# Altium PCB SPT3G_LCBoardRev0.PcbDoc (part 2 of 3)
Units mil, origin at the board's own origin, x right, y up, seen from the top; angles counter-clockwise.
Board outline 7438.98 x 1969 mil, 6 copper layers (Top Layer, Signal Layer 1, Internal Plane 1, Internal Plane 2, Signal Layer 2, Bottom Layer), stack 61.6 mil thick; 29 components, 149 nets, 701 pads, 136 vias.
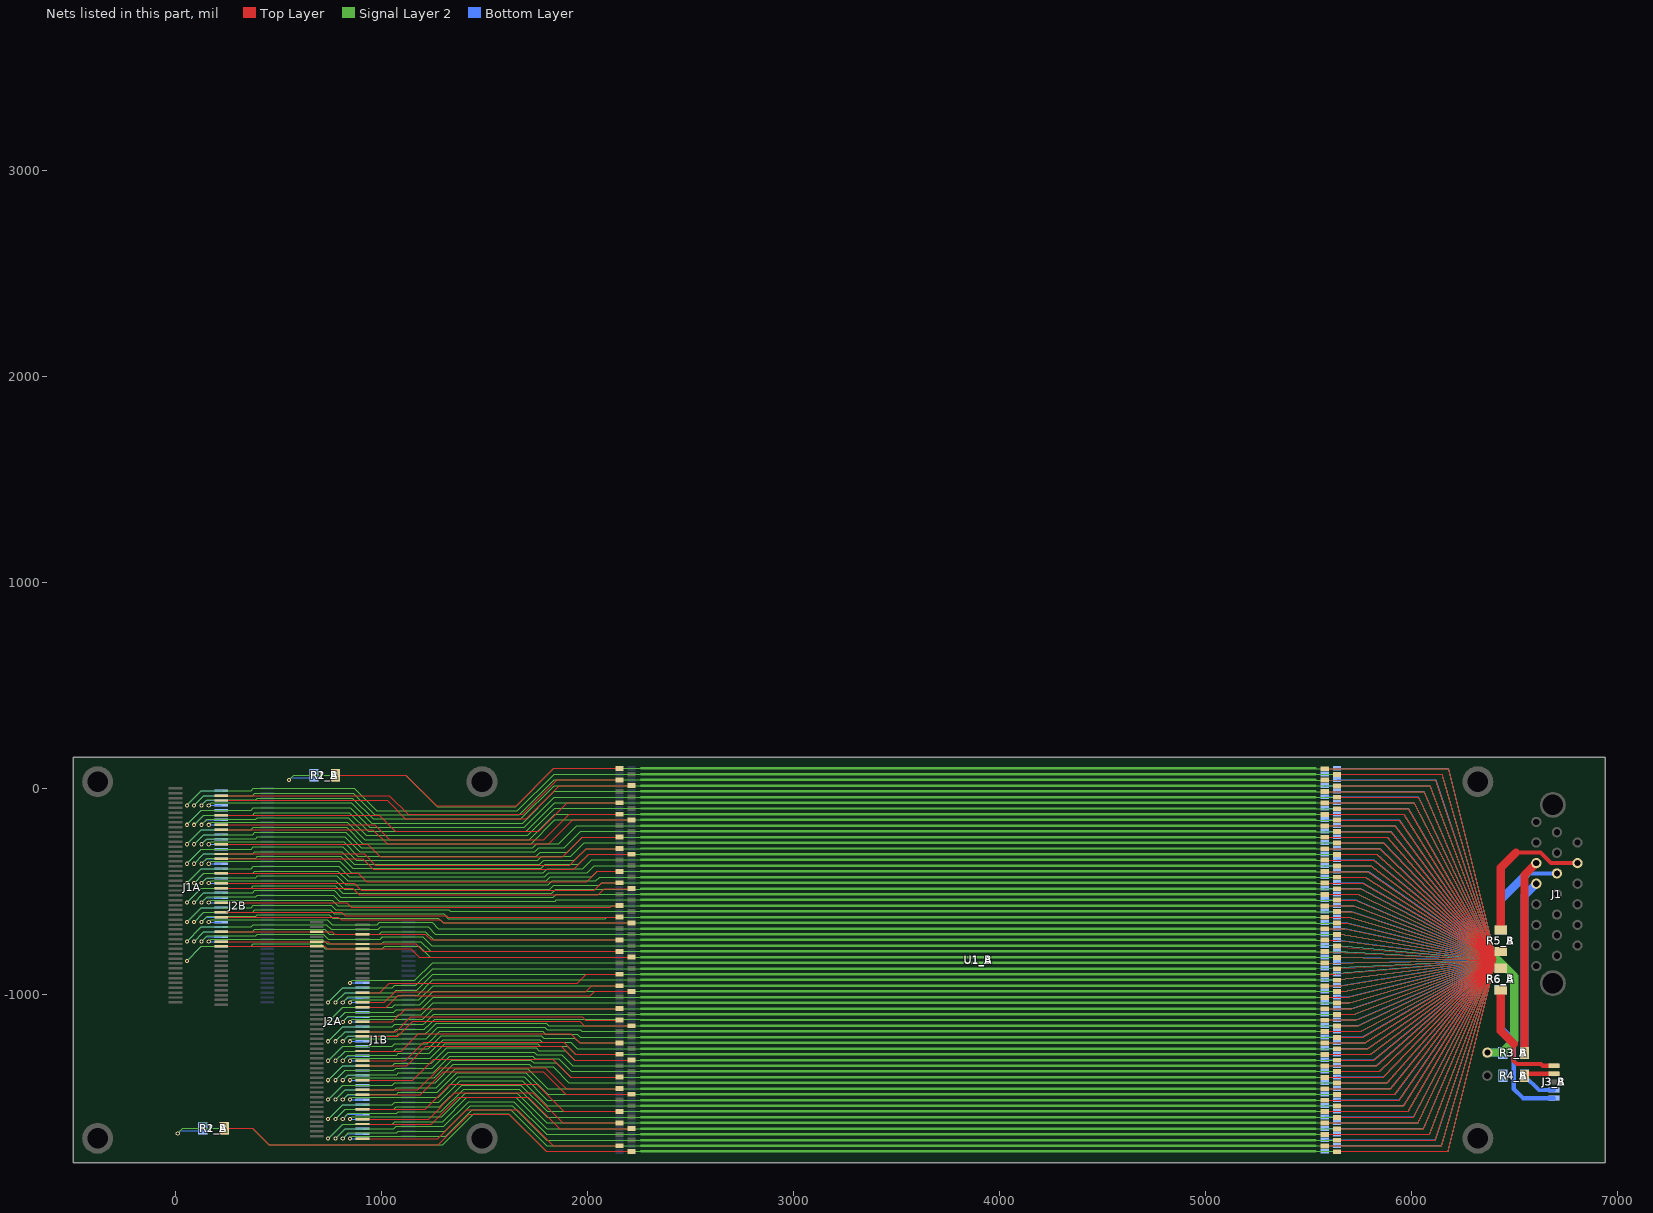
[diagram p6: the nets of this part, all layers, seen from the top]

## Via types
v1: diameter 20, hole 10, Top Layer to Bottom Layer, 136 vias

## Nets (pads, with @x,y where several pads share a name; then routed paths per layer and width w, separated by ;. In a path a pad name is that pad's centre, name@x,y a point inside that pad or via, vN(x,y) a via of type N, cw(c..) or ccw(c..) an arc to the next point about the centre after c; other vN are vias at no path point) (continued)
BOLORETURN_B: J1B.1 J1B.3 J1B.5 J1B.7 J1B.9 J1B.11 J1B.13 J1B.15 J1B.17 J1B.19 J1B.21 J1B.23 J1B.25 J1B.27 J1B.29 J1B.31 J1B.33 J1B.35 J1B.37 J1B.39 J1B.41 J1B.43 J1B.45 J1B.47 J1B.49 J1B.51 J1B.53 J1B.55 J1B.57 J1B.59 J1B.61 J1B.63 J1B.65 J2B.25 J2B.27 J2B.29 J2B.31 J2B.33 J2B.35 J2B.37 J2B.39 J2B.41 J2B.43 J2B.45 J2B.47 J2B.49 J2B.51 J2B.53 J2B.55 J2B.57 J2B.59 J2B.61 J2B.63 J2B.65 J2B.67 J2B.69 J2B.71 J2B.73 J2B.75 J2B.77 J2B.79 J2B.81 J2B.83 J2B.85 J2B.87 J2B.89 pad.0@6369.59,-1283.27 R1_B.1 R2_B.1 R3_B.1 R4_B.1 | length 436211.5
  Signal Layer 2 w6: v1(10.74,-1675.14) 34.64,-1651.23 34.74,-1651.33 373.22,-1651.33 453.76,-1731.87 1297.1,-1731.87 1448.27,-1580.7 1618.25,-1580.7 1800.88,-1763.33 2260,-1763.33 ; v1(55.12,-838.58) 125.98,-767.72 366.67,-767.72 378.48,-755.91 704.48,-755.91 727.52,-778.94 1004.78,-778.94 1016,-767.72 1184.37,-767.72 1236.29,-819.63 2260,-819.63 ; v1(55.12,-744.09) 125.98,-673.23 366.67,-673.23 378.48,-661.42 731.57,-661.42 755.19,-685.04 983.62,-685.04 995.43,-673.23 1226.41,-673.23 1261.79,-708.61 2260,-708.61 ; v1(55.12,-649.61) 125.98,-578.74 366.67,-578.74 378.48,-566.93 755.66,-566.93 778.56,-589.83 1326.98,-589.83 1334.73,-597.58 2260,-597.58 ; v1(55.12,-555.12) 125.98,-484.25 366.67,-484.25 378.48,-472.44 774.31,-472.44 810.77,-508.9 1826.06,-508.9 1845.25,-489.72 2260,-489.72 ; v1(55.12,-460.63) 125.98,-389.76 366.67,-389.76 378.48,-377.95 792.96,-377.95 843.91,-428.9 1792.93,-428.9 1812.11,-409.72 1999.95,-409.72 2034.13,-375.54 2260,-375.54 ; v1(55.12,-366.14) 125.98,-295.28 366.67,-295.28 378.48,-283.46 811.61,-283.46 877.05,-348.9 1759.79,-348.9 1778.98,-329.72 1919.07,-329.72 1984.28,-264.51 2260,-264.51 ; v1(55.12,-271.65) 125.98,-200.79 366.67,-200.79 378.48,-188.98 830.26,-188.98 910.18,-268.9 1726.65,-268.9 1842.07,-153.49 2260,-153.49 ; v1(55.12,-177.17) 125.98,-106.3 366.67,-106.3 378.48,-94.49 848.91,-94.49 943.32,-188.9 1693.52,-188.9 1839.96,-42.46 2260,-42.46 ; v1(55.12,-82.68) 125.98,-11.81 366.67,-11.81 378.48,0 867.55,0 976.46,-108.9 1660.38,-108.9 1837.84,68.56 2260,68.56 ; v1(90.55,-744.09) 137.8,-696.85 373.9,-696.85 385.71,-685.04 723.37,-685.04 746.99,-708.66 988.89,-708.66 1000.7,-696.85 1213.1,-696.85 1252.61,-736.36 2260,-736.36 ; v1(90.55,-649.61) 137.8,-602.36 373.9,-602.36 385.71,-590.55 750.69,-590.55 769.74,-609.61 ; v1(90.55,-555.12) 137.8,-507.87 373.9,-507.87 385.71,-496.06 769.65,-496.06 802.49,-528.9 1834.35,-528.9 1848.86,-514.39 2258.77,-514.39 2260,-513.17 ; v1(90.55,-460.63) 137.8,-413.39 373.9,-413.39 385.71,-401.57 788.3,-401.57 835.63,-448.9 1801.21,-448.9 1820.4,-429.72 2021.97,-429.72 2048.4,-403.29 2260,-403.29 ; v1(90.55,-366.14) 137.8,-318.9 373.9,-318.9 385.71,-307.09 806.95,-307.09 868.76,-368.9 1768.08,-368.9 1787.26,-349.72 1936.53,-349.72 1993.98,-292.27 2260,-292.27 ; v1(90.55,-271.65) 137.8,-224.41 373.9,-224.41 385.71,-212.6 825.59,-212.6 901.9,-288.9 1734.94,-288.9 1754.6,-269.24 1860.91,-269.24 1948.91,-181.24 2260,-181.24 ; v1(90.55,-177.17) 137.8,-129.92 373.9,-129.92 385.71,-118.11 844.24,-118.11 935.04,-208.9 1701.8,-208.9 1840.48,-70.22 2260,-70.22 ; v1(90.55,-82.68) 137.8,-35.43 373.9,-35.43 385.71,-23.62 862.89,-23.62 968.17,-128.9 1668.67,-128.9 1838.37,40.8 2260,40.8 ; v1(125.98,-744.09) 153.54,-716.54 388.33,-716.54 396.2,-708.66 717.57,-708.66 741.28,-732.36 993.27,-732.36 ; v1(125.98,-649.61) 153.54,-622.05 388.33,-622.05 396.2,-614.17 746.66,-614.17 762.09,-629.61 ; v1(125.98,-555.12) 153.54,-527.56 388.33,-527.56 396.2,-519.68 764.99,-519.68 794.2,-548.9 1842.63,-548.9 1849.47,-542.07 2260,-542.07 ; v1(125.98,-460.63) 153.54,-433.07 388.33,-433.07 396.2,-425.2 783.63,-425.2 827.34,-468.9 1809.5,-468.9 1828.68,-449.72 2040.22,-449.72 2058.89,-431.05 2260,-431.05 ; v1(125.98,-366.14) 153.54,-338.58 388.33,-338.58 396.2,-330.71 802.28,-330.71 860.48,-388.9 1776.36,-388.9 1795.55,-369.72 1956.27,-369.72 2005.97,-320.02 2260,-320.02 ; v1(125.98,-271.65) 153.54,-244.09 388.33,-244.09 396.2,-236.22 820.93,-236.22 893.61,-308.9 1743.22,-308.9 1762.88,-289.24 1886.65,-289.24 1966.89,-209 2260,-209 ; v1(125.98,-177.17) 153.54,-149.61 388.33,-149.61 396.2,-141.73 839.58,-141.73 926.75,-228.9 1710.09,-228.9 1841.01,-97.98 2260,-97.98 ; v1(125.98,-82.68) 153.54,-55.12 388.33,-55.12 396.2,-47.24 858.23,-47.24 959.89,-148.9 1676.95,-148.9 1838.9,13.05 2260,13.05 ; v1(161.42,-744.09) 173.23,-732.28 712.68,-732.28 736.3,-755.91 998.32,-755.91 1010.13,-744.09 1190.45,-744.09 1238.23,-791.87 2260,-791.87 ; v1(161.42,-649.61) 173.23,-637.8 736.17,-637.8 759.79,-661.42 979.46,-661.42 990.04,-650.84 1245.56,-650.84 1275.57,-680.85 2260,-680.85 ; v1(161.42,-555.12) 173.23,-543.31 760.32,-543.31 786.84,-569.83 957.11,-569.83 957.33,-569.61 1164,-569.61 1164.22,-569.83 2260,-569.83 ; v1(161.42,-460.63) 173.23,-448.82 778.97,-448.82 819.06,-488.9 1817.78,-488.9 1836.97,-469.72 2058.2,-469.72 2069.11,-458.8 2260,-458.8 ; v1(161.42,-366.14) 173.23,-354.33 797.62,-354.33 852.19,-408.9 1784.64,-408.9 1803.83,-389.72 1978.24,-389.72 2020.17,-347.78 2260,-347.78 ; v1(161.42,-271.65) 173.23,-259.84 816.27,-259.84 885.33,-328.9 1751.51,-328.9 1770.69,-309.72 1903.06,-309.72 1976.02,-236.76 2260,-236.76 ; v1(161.42,-177.17) 173.23,-165.35 834.92,-165.35 918.47,-248.9 1718.37,-248.9 1841.54,-125.73 2260,-125.73 ; v1(161.42,-82.68) 173.23,-70.87 853.57,-70.87 951.6,-168.9 1685.23,-168.9 1839.43,-14.71 2260,-14.71 ; v1(550.8,40.1) 574.7,64 1118.5,64 1271.4,-88.9 1652.1,-88.9 1837.31,96.32 2260,96.32 ; v1(741.1,-1700.79) 811.97,-1629.92 1052.66,-1629.92 1064.47,-1618.11 1297.72,-1618.11 1415.13,-1500.7 1651.39,-1500.7 1803,-1652.31 2260,-1652.31 ; v1(741.1,-1606.3) 811.97,-1535.43 1052.66,-1535.43 1064.47,-1523.62 1130.87,-1523.62 1279.07,-1523.62 1381.99,-1420.7 1684.52,-1420.7 1805.11,-1541.28 2260,-1541.28 ; v1(741.1,-1511.81) 811.97,-1440.94 1052.66,-1440.94 1064.47,-1429.13 1130.87,-1429.13 1260.42,-1429.13 1348.86,-1340.7 1717.66,-1340.7 1730.03,-1353.07 1833.26,-1353.07 1910.45,-1430.26 2260,-1430.26 ; v1(741.1,-1417.32) 811.97,-1346.46 1052.66,-1346.46 1064.47,-1334.65 1130.87,-1334.65 1241.77,-1334.65 1315.72,-1260.7 1750.8,-1260.7 1763.17,-1273.07 1893.32,-1273.07 1939.49,-1319.24 2260,-1319.24 ; v1(741.1,-1322.83) 811.97,-1251.97 1052.66,-1251.97 1064.47,-1240.16 1130.87,-1240.16 1222.52,-1240.16 1247.87,-1214.8 1248.48,-1214.8 1282.58,-1180.7 1783.94,-1180.7 1796.31,-1193.07 1950.7,-1193.07 1965.85,-1208.21 2260,-1208.21 ; v1(741.1,-1228.35) 811.97,-1157.48 1052.65,-1157.48 1064.47,-1145.67 1130.87,-1145.67 1203.87,-1145.67 1214.73,-1134.8 1215.34,-1134.8 1252.96,-1097.19 2260,-1097.19 ; v1(741.1,-1133.86) 811.97,-1062.99 1052.65,-1062.99 1064.47,-1051.18 1130.87,-1051.18 1185.83,-1051.18 1250.84,-986.17 2260,-986.17 ; v1(741.1,-1039.37) 811.97,-968.5 1052.66,-968.5 1064.47,-956.69 1130.87,-956.69 1167.18,-956.69 1248.73,-875.14 2260,-875.14 ; 762.31,-629.83 1276.09,-629.83 1299.36,-653.09 2260,-653.09 ; 769.96,-609.83 1301.54,-609.83 1324.21,-632.5 2087.22,-632.5 2094.71,-625.01 2260,-625.01 ; v1(776.54,-1700.79) 823.78,-1653.54 1059.88,-1653.54 1071.69,-1641.73 1302.38,-1641.73 1423.42,-1520.7 1643.1,-1520.7 1802.47,-1680.06 2260,-1680.06 ; v1(776.54,-1606.3) 823.78,-1559.06 1059.88,-1559.06 1071.69,-1547.24 1130.87,-1547.24 1283.73,-1547.24 1390.28,-1440.7 1676.24,-1440.7 1804.58,-1569.04 2260,-1569.04 ; v1(776.54,-1511.81) 823.78,-1464.57 1059.88,-1464.57 1071.69,-1452.76 1130.87,-1452.76 1265.08,-1452.76 1357.14,-1360.7 1709.38,-1360.7 1806.7,-1458.02 2260,-1458.02 ; v1(776.54,-1417.32) 823.78,-1370.08 1059.88,-1370.08 1071.69,-1358.27 1130.87,-1358.27 1246.43,-1358.27 1324,-1280.7 1742.51,-1280.7 1754.89,-1293.07 1875.02,-1293.07 1928.95,-1346.99 2260,-1346.99 ; v1(776.54,-1322.83) 823.78,-1275.59 1059.88,-1275.59 1071.69,-1263.78 1130.87,-1263.78 1227.18,-1263.78 1256.16,-1234.8 1256.76,-1234.8 1290.87,-1200.7 1775.65,-1200.7 1788.02,-1213.07 1939.46,-1213.07 1962.36,-1235.97 2260,-1235.97 ; v1(776.54,-1228.35) 823.78,-1181.1 1059.88,-1181.1 1071.69,-1169.29 1130.87,-1169.29 1208.53,-1169.29 1223.02,-1154.8 1223.63,-1154.8 1257.73,-1120.7 2260,-1120.7 ; v1(776.54,-1133.86) 823.78,-1086.61 1059.88,-1086.61 1071.69,-1074.8 1130.87,-1074.8 1190.49,-1074.8 1251.37,-1013.92 2260,-1013.92 ; v1(776.54,-1039.37) 823.78,-992.13 1059.88,-992.13 1071.69,-980.31 1171.84,-980.31 1249.26,-902.9 2260,-902.9 ; v1(811.97,-1700.79) 839.53,-1673.23 1074.31,-1673.23 1082.19,-1665.35 1307.04,-1665.35 1431.7,-1540.7 1634.82,-1540.7 1801.94,-1707.82 2260,-1707.82 ; v1(811.97,-1606.3) 839.53,-1578.74 1074.31,-1578.74 1082.19,-1570.87 1130.87,-1570.87 1288.39,-1570.87 1398.56,-1460.7 1667.96,-1460.7 1804.05,-1596.8 2260,-1596.8 ; v1(811.97,-1511.81) 839.53,-1484.25 1074.31,-1484.25 1082.19,-1476.38 1130.87,-1476.38 1269.75,-1476.38 1365.43,-1380.7 1701.09,-1380.7 1806.17,-1485.77 2260,-1485.77 ; v1(811.97,-1417.32) 839.53,-1389.76 1074.31,-1389.76 1082.19,-1381.89 1130.87,-1381.89 1251.1,-1381.89 1332.29,-1300.7 1734.23,-1300.7 1746.6,-1313.07 1860.01,-1313.07 1921.69,-1374.75 2260,-1374.75 ; v1(811.97,-1322.83) 839.53,-1295.28 1074.31,-1295.28 1082.19,-1287.4 1130.87,-1287.4 1232.45,-1287.4 1299.15,-1220.7 1767.37,-1220.7 1779.74,-1233.07 1920.07,-1233.07 1950.72,-1263.72 2260,-1263.72 ; v1(811.97,-1228.35) 839.53,-1200.79 1074.31,-1200.79 1082.19,-1192.91 1130.87,-1192.91 1213.19,-1192.91 1231.3,-1174.8 1231.91,-1174.8 1266.02,-1140.7 1800.5,-1140.7 1812.88,-1153.07 2260,-1153.07 ; v1(811.97,-1133.86) 839.53,-1106.3 1074.31,-1106.3 1082.19,-1098.43 1130.87,-1098.43 1194.54,-1098.43 1198.17,-1094.8 1198.77,-1094.8 1251.9,-1041.68 2260,-1041.68 ; v1(811.97,-1039.37) 839.53,-1011.81 1074.31,-1011.81 1082.19,-1003.94 1130.87,-1003.94 1176.5,-1003.94 1249.79,-930.65 2260,-930.65 ; v1(847.4,-1700.79) 859.21,-1688.98 1311.71,-1688.98 1439.98,-1560.7 1626.54,-1560.7 1801.41,-1735.57 2260,-1735.57 ; v1(847.4,-1606.3) 859.21,-1594.49 1130.87,-1594.49 1293.06,-1594.49 1406.85,-1480.7 1659.67,-1480.7 1803.53,-1624.55 2260,-1624.55 ; v1(847.4,-1511.81) 859.21,-1500 1130.87,-1500 1274.41,-1500 1373.71,-1400.7 1692.81,-1400.7 1805.64,-1513.53 2260,-1513.53 ; v1(847.4,-1417.32) 859.21,-1405.51 1130.87,-1405.51 1255.76,-1405.51 1340.57,-1320.7 1725.95,-1320.7 1738.32,-1333.07 1849.37,-1333.07 1918.8,-1402.5 2260,-1402.5 ; v1(847.4,-1322.83) 859.21,-1311.02 1130.87,-1311.02 1237.11,-1311.02 1307.44,-1240.7 1759.08,-1240.7 1771.46,-1253.07 1901.61,-1253.07 1940.02,-1291.48 2260,-1291.48 ; v1(847.4,-1228.35) 859.21,-1216.54 1130.87,-1216.54 1217.85,-1216.54 1239.59,-1194.8 1240.19,-1194.8 1274.3,-1160.7 1792.22,-1160.7 1804.59,-1173.07 1965.53,-1173.07 1972.92,-1180.46 2260,-1180.46 ; v1(847.4,-1133.86) 859.21,-1122.05 1130.87,-1122.05 1199.21,-1122.05 1206.45,-1114.8 1207.06,-1114.8 1252.43,-1069.43 2260,-1069.43 ; v1(847.4,-1039.37) 859.21,-1027.56 1181.16,-1027.56 1250.31,-958.41 2260,-958.41 ; v1(847.4,-944.88) 859.21,-933.07 1162.52,-933.07 1248.2,-847.39 2260,-847.39 ; 1004.14,-721.5 993.27,-732.36 ; 2260,-764.12 1243.06,-764.12 1199.42,-720.47 1005.16,-720.47 993.27,-732.36 ; 5532.88,-1680.06 6088.99,-1680.06 6399.51,-861.65 6399.88,-860.67 6410,-834 ; 5532.88,-1652.3 6061.32,-1652.3 6399.02,-859.78 6399.42,-858.83 6410,-834 ; 5532.88,-1624.54 6034.95,-1624.54 6410,-834 ; 5532.88,-1596.79 6012.68,-1596.79 6410,-834 ; 5532.88,-1569.03 5985.93,-1569.03 6410,-834 ; 5532.88,-1541.28 5963.16,-1541.28 6410,-834 ; 5532.88,-1513.52 5941.51,-1513.52 6410,-834 ; 5532.88,-1346.98 5832.55,-1346.98 6410,-834 ; 5532.88,-1291.47 5802.37,-1291.47 6410,-834 ; 5532.88,-1263.72 5789.87,-1263.72 6410,-834 ; 5532.88,-1208.2 5765.06,-1208.2 6410,-834 ; 5532.88,-1152.69 5742.65,-1152.69 6410,-834 ; 5532.88,-1124.94 5732.15,-1124.94 5742.65,-1120.41 6410,-834 ; 5532.88,-1097.18 5721.94,-1097.18 6410,-834 ; 5532.88,-1069.43 5711.84,-1069.43 6410,-834 ; 5532.88,-1041.67 5701.55,-1041.67 6410,-834 ; 5532.88,-1013.91 5690.58,-1013.91 6410,-834 ; 5532.88,-986.16 5678.1,-986.16 6410,-834 ; 5532.88,-958.4 5662.44,-958.4 6410,-834 ; 5532.89,-930.65 5639.81,-930.65 6410,-834 ; 5532.88,-764.12 5639.06,-763.17 6410,-834 ; 5532.88,-737.36 5639.81,-737.36 6410,-834 ; 5532.88,-709.61 5662.44,-709.61 6410,-834 ; 5532.88,-681.85 5678.1,-681.85 6410,-834 ; 5532.88,-654.09 5690.58,-654.09 6410,-834 ; 5532.88,-626.34 5701.55,-626.34 6410,-834 ; 5532.88,-570.83 5721.94,-570.83 6410,-834 ; 5532.88,-515.31 5742.65,-515.31 6410,-834 ; 5532.88,-459.8 5765.06,-459.8 6410,-834 ; 5532.88,-404.29 5789.87,-404.29 6410,-834 ; 5532.88,-376.54 5802.37,-376.54 6410,-834 ; 5532.88,-348.78 5817.53,-348.78 6410,-834 ; 5532.88,-321.02 5832.55,-321.02 6410,-834 ; 5532.88,-293.27 5847.23,-293.27 6410,-834 ; 5532.88,-265.51 5865.13,-265.51 6410,-834 ; 5532.88,-237.76 5882.76,-237.76 6410,-834 ; 5532.88,-210 5901.35,-210 6410,-834 ; 5532.88,95.32 6180.49,95.32 6401.87,-801.07 ; 5533.88,-1763.32 6180.49,-1763.32 6401.87,-866.94 ; 5533.88,-1735.57 6148.51,-1735.57 6400.94,-865.24 6401.24,-864.21 6410,-834 ; 5533.88,-1707.73 6117.7,-1708.81 6400.15,-863.47 6400.49,-862.47 6410,-834 ; 5533.88,-1485.76 5920.92,-1485.76 6410,-834 ; 5533.88,-1458.01 5901.35,-1458.01 6410,-834 ; 5533.88,-1430.25 5882.76,-1430.25 6410,-834 ; 5533.88,-1402.5 5865.13,-1402.5 6410,-834 ; 5533.88,-1374.74 5847.23,-1374.74 6410,-834 ; 5533.88,-1319.23 5817.53,-1319.23 6410,-834 ; 5533.88,-1235.96 5777.13,-1235.96 6410,-834 ; 5533.88,-1180.45 5753.59,-1180.45 6410,-834 ; 5533.88,-903.9 5580,-902.9 6410,-834 ; 5533.88,-876.14 5701.55,-866.94 6410,-834 ; 5533.88,-848.39 5580,-848.39 6410,-834 ; 5533.88,-820.63 5639.06,-820.63 6410,-834 ; 5533.88,-792.87 5690.58,-792.87 6410,-834 ; 5533.88,-598.58 5711.84,-598.58 6410,-834 ; 5533.88,-543.07 5732.15,-543.07 5742.65,-547.59 6410,-834 ; 5533.88,-487.56 5753.59,-487.56 6410,-834 ; 5533.88,-432.05 5777.13,-432.05 6410,-834 ; 5533.88,-182.24 5920.92,-182.24 6410,-834 ; 5533.88,-154.49 5941.51,-154.49 6410,-834 ; 5533.88,-126.73 5963.16,-126.73 6410,-834 ; 5533.88,-98.98 5985.93,-98.98 6410,-834 ; 5533.88,-71.22 6012.68,-71.22 6410,-834 ; 5533.88,-43.46 6034.95,-43.46 6410,-834 ; 5533.88,-15.71 6061.32,-15.71 6399.02,-808.23 6410,-834 ; 5533.88,12.05 6088.99,12.05 6399.51,-806.36 6410,-834 ; 5533.88,39.8 5580,39.8 6117.7,40.8 6400.15,-804.53 6410,-834 ; 5533.88,67.56 6148.51,67.56 6400.94,-802.77 6410,-834 ; 6401.87,-866.94 6402.13,-865.88 ; 6401.87,-866.94 6402.13,-865.89 ; 6401.87,-801.07 6410,-834 ; 6401.87,-801.07 6410,-834 ; 6402.13,-865.89 6410,-834 ; 6402.13,-865.88 6410,-834
  Signal Layer 2 w12: 2260,-1763.33 5532.88,-1763.33 ; 2260,-1735.57 5532.88,-1735.57 ; 2260,-1707.82 5532.88,-1707.82 ; 2260,-1680.06 5532.88,-1680.06 ; 2260,-1652.31 5532.88,-1652.31 ; 2260,-1624.55 5532.88,-1624.55 ; 2260,-1596.8 5532.88,-1596.8 ; 2260,-1569.04 5532.88,-1569.04 ; 2260,-1541.28 5532.88,-1541.28 ; 2260,-1513.53 5532.88,-1513.53 ; 2260,-1485.77 5532.88,-1485.77 ; 2260,-1458.02 5532.88,-1458.02 ; 2260,-1430.26 5532.88,-1430.26 ; 2260,-1402.5 5532.88,-1402.5 ; 2260,-1374.75 5532.88,-1374.75 ; 2260,-1346.99 5532.88,-1346.99 ; 2260,-1319.24 5532.88,-1319.24 ; 2260,-1291.48 5532.88,-1291.48 ; 2260,-1263.72 5532.88,-1263.72 ; 2260,-1235.97 5532.88,-1235.97 ; 2260,-1208.21 5532.88,-1208.21 ; 2260,-1180.46 5532.88,-1180.46 ; 2260,-1152.7 5532.88,-1152.7 ; 2260,-1124.94 5532.88,-1124.94 ; 2260,-1097.19 5532.88,-1097.19 ; 2260,-1069.43 5532.88,-1069.43 ; 2260,-1041.68 5532.88,-1041.68 ; 2260,-1013.92 5532.88,-1013.92 ; 2260,-986.17 5532.88,-986.17 ; 2260,-958.41 5532.88,-958.41 ; 2260,-930.65 5532.88,-930.65 ; 2260,-902.9 5532.88,-902.9 ; 2260,-875.14 5532.88,-875.14 ; 2260,-847.39 5532.88,-847.39 ; 2260,-819.63 5532.88,-819.63 ; 2260,-791.87 5532.88,-791.87 ; 2260,-764.12 5532.88,-764.12 ; 2260,-736.36 5532.88,-736.36 ; 2260,-708.61 5532.88,-708.61 ; 2260,-680.85 5532.88,-680.85 ; 2260,-653.09 5532.88,-653.09 ; 2260,-625.34 5532.88,-625.34 ; 2260,-597.58 5532.88,-597.58 ; 2260,-569.83 5532.88,-569.83 ; 2260,-542.07 5532.88,-542.07 ; 2260,-514.31 5532.88,-514.31 ; 2260,-486.56 5532.88,-486.56 ; 2260,-458.8 5532.88,-458.8 ; 2260,-431.05 5532.88,-431.05 ; 2260,-403.29 5532.88,-403.29 ; 2260,-375.54 5532.88,-375.54 ; 2260,-347.78 5532.88,-347.78 ; 2260,-320.02 5532.88,-320.02 ; 2260,-292.27 5532.88,-292.27 ; 2260,-264.51 5532.88,-264.51 ; 2260,-236.76 5532.88,-236.76 ; 2260,-209 5532.88,-209 ; 2260,-181.24 5532.88,-181.24 ; 2260,-153.49 5532.88,-153.49 ; 2260,-125.73 5532.88,-125.73 ; 2260,-97.98 5532.88,-97.98 ; 2260,-70.22 5532.88,-70.22 ; 2260,-42.46 5532.88,-42.46 ; 2260,-14.71 5532.88,-14.71 ; 2260,13.05 5532.88,13.05 ; 2260,40.8 5532.88,40.8 ; 2260,68.56 5532.88,68.56 ; 2260,96.32 5532.88,96.32
  Signal Layer 2 w40: pad.0@6369.59,-1283.27 6440.09,-1283.27 6500.5,-1222.86 6500.5,-913.15 6421.35,-834 6410,-834
  Bottom Layer w6: v1(10.74,-1675.14) 22.95,-1662.93 R1_B.1@131.91,-1662.93 ; v1(55.12,-838.58) 125.98,-767.72 J2B.25@222.44,-767.72 ; v1(55.12,-744.09) 125.98,-673.23 J2B.33@222.44,-673.23 ; v1(55.12,-649.61) 125.98,-578.74 J2B.41@222.44,-578.74 ; v1(55.12,-555.12) 125.98,-484.25 J2B.49@222.44,-484.25 ; v1(55.12,-460.63) 125.98,-389.76 J2B.57@222.44,-389.76 ; v1(55.12,-366.14) 125.98,-295.28 J2B.65@222.44,-295.28 ; v1(55.12,-271.65) 125.98,-200.79 J2B.73@222.44,-200.79 ; v1(55.12,-177.17) 125.98,-106.3 J2B.81@222.44,-106.3 ; v1(55.12,-82.68) 125.98,-11.81 J2B.89@222.44,-11.81 ; v1(90.55,-744.09) 137.8,-696.85 J2B.31@222.44,-696.85 ; v1(90.55,-649.61) 137.8,-602.36 J2B.39@222.44,-602.36 ; v1(90.55,-555.12) 137.8,-507.87 J2B.47@222.44,-507.87 ; v1(90.55,-460.63) 137.8,-413.39 J2B.55@222.44,-413.39 ; v1(90.55,-366.14) 137.8,-318.9 J2B.63@222.44,-318.9 ; v1(90.55,-271.65) 137.8,-224.41 J2B.71@222.44,-224.41 ; v1(90.55,-177.17) 137.8,-129.92 J2B.79@222.44,-129.92 ; v1(90.55,-82.68) 137.8,-35.43 J2B.87@222.44,-35.43 ; v1(125.98,-744.09) 149.61,-720.47 J2B.29@222.44,-720.47 ; v1(125.98,-649.61) 149.61,-625.98 J2B.37@222.44,-625.98 ; v1(125.98,-555.12) 149.61,-531.5 J2B.45@222.44,-531.5 ; v1(125.98,-460.63) 149.61,-437.01 J2B.53@222.44,-437.01 ; v1(125.98,-366.14) 149.61,-342.52 J2B.61@222.44,-342.52 ; v1(125.98,-271.65) 149.61,-248.03 J2B.69@222.44,-248.03 ; v1(125.98,-177.17) 149.61,-153.54 J2B.77@222.44,-153.54 ; v1(125.98,-82.68) 149.61,-59.06 J2B.85@222.44,-59.06 ; v1(161.42,-744.09) J2B.27@222.44,-744.09 ; v1(161.42,-649.61) J2B.35@222.44,-649.61 ; v1(161.42,-555.12) J2B.43@222.44,-555.12 ; v1(161.42,-460.63) J2B.51@222.44,-460.63 ; v1(161.42,-366.14) J2B.59@222.44,-366.14 ; v1(161.42,-271.65) J2B.67@222.44,-271.65 ; v1(161.42,-177.17) J2B.75@222.44,-177.17 ; v1(161.42,-82.68) J2B.83@222.44,-82.68 ; v1(550.8,40.1) 563.01,52.31 R2_B.1@671.97,52.31 ; v1(741.1,-1700.79) 811.97,-1629.92 J1B.7@908.43,-1629.92 ; v1(741.1,-1606.3) 811.97,-1535.43 J1B.15@908.43,-1535.43 ; v1(741.1,-1511.81) 811.97,-1440.94 J1B.23@908.43,-1440.94 ; v1(741.1,-1417.32) 811.97,-1346.46 J1B.31@908.43,-1346.46 ; v1(741.1,-1322.83) 811.97,-1251.97 J1B.39@908.43,-1251.97 ; v1(741.1,-1228.35) 811.97,-1157.48 J1B.47@908.43,-1157.48 ; v1(741.1,-1133.86) 811.97,-1062.99 J1B.55@908.43,-1062.99 ; v1(741.1,-1039.37) 811.97,-968.5 J1B.63@908.43,-968.5 ; v1(776.54,-1700.79) 823.78,-1653.54 J1B.5@908.43,-1653.54 ; v1(776.54,-1606.3) 823.78,-1559.06 J1B.13@908.43,-1559.06 ; v1(776.54,-1511.81) 823.78,-1464.57 J1B.21@908.43,-1464.57 ; v1(776.54,-1417.32) 823.78,-1370.08 J1B.29@908.43,-1370.08 ; v1(776.54,-1322.83) 823.78,-1275.59 J1B.37@908.43,-1275.59 ; v1(776.54,-1228.35) 823.78,-1181.1 J1B.45@908.43,-1181.1 ; v1(776.54,-1133.86) 823.78,-1086.61 J1B.53@908.43,-1086.61 ; v1(776.54,-1039.37) 823.78,-992.13 J1B.61@908.43,-992.13 ; v1(811.97,-1700.79) 835.59,-1677.17 J1B.3@908.43,-1677.17 ; v1(811.97,-1606.3) 835.59,-1582.68 J1B.11@908.43,-1582.68 ; v1(811.97,-1511.81) 835.59,-1488.19 J1B.19@908.43,-1488.19 ; v1(811.97,-1417.32) 835.59,-1393.7 J1B.27@908.43,-1393.7 ; v1(811.97,-1322.83) 835.59,-1299.21 J1B.35@908.43,-1299.21 ; v1(811.97,-1228.35) 835.59,-1204.72 J1B.43@908.43,-1204.72 ; v1(811.97,-1133.86) 835.59,-1110.24 J1B.51@908.43,-1110.24 ; v1(811.97,-1039.37) 835.59,-1015.75 J1B.59@908.43,-1015.75 ; v1(847.4,-1700.79) J1B.1@908.43,-1700.79 ; v1(847.4,-1606.3) J1B.9@908.43,-1606.3 ; v1(847.4,-1511.81) J1B.17@908.43,-1511.81 ; v1(847.4,-1417.32) J1B.25@908.43,-1417.32 ; v1(847.4,-1322.83) J1B.33@908.43,-1322.83 ; v1(847.4,-1228.35) J1B.41@908.43,-1228.35 ; v1(847.4,-1133.86) J1B.49@908.43,-1133.86 ; v1(847.4,-1039.37) J1B.57@908.43,-1039.37 ; v1(847.4,-944.88) J1B.65@908.43,-944.88
  Bottom Layer w10: R3_B.1@6442.9,-1283.27 R3_B.1@6444.48,-1284.85
  Bottom Layer w40: pad.0@6369.59,-1283.27 R3_B.1@6442.9,-1283.27
BOLORETURNMD_A: J1.19 R3_A.2 | length 945.8
  Top Layer w40: R3_A.2@6549.69,-1285.09 6549.69,-420.73 J1.19@6607.24,-363.17
BOLORETURNMD_B: J1.18 R3_B.2 | length 845.6
  Bottom Layer w40: R3_B.2@6549.48,-1284.85 6549.48,-520.93 J1.18@6607.24,-463.17
BOLORETURNZIFF_A: J3_A.2 R4_A.2 | length 147.4
  Top Layer w20: R4_A.2@6549.75,-1396.59 6560.38,-1385.96 J3_A.2@6692.77,-1385.96
BOLORETURNZIFF_B: J3_B.2 R4_B.2 | length 171.7
  Bottom Layer w20: R4_B.2@6549.97,-1395.95 6619.73,-1465.7 J3_B.2@6692.77,-1465.7
BOTCOMBMD: J1.7 R5_B.2 | length 472.5
  Bottom Layer w20: 6561.8,-413.17 J1.7@6707.24,-413.17
  Bottom Layer w40: R5_B.2@6435.44,-687.88 6435.44,-539.53 6561.8,-413.17
COMB_A: R5_A.1 R6_A.1 U1_A.69 U1_A.70 U1_A.71 U1_A.72 U1_A.73 U1_A.74 U1_A.75 U1_A.76 U1_A.77 U1_A.78 U1_A.79 U1_A.80 U1_A.81 U1_A.82 U1_A.83 U1_A.84 U1_A.85 U1_A.86 U1_A.87 U1_A.88 U1_A.89 U1_A.90 U1_A.91 U1_A.92 U1_A.93 U1_A.94 U1_A.95 U1_A.96 U1_A.97 U1_A.98 U1_A.99 U1_A.100 U1_A.101 U1_A.102 U1_A.103 U1_A.104 U1_A.105 U1_A.106 U1_A.107 U1_A.108 U1_A.109 U1_A.110 U1_A.111 U1_A.112 U1_A.113 U1_A.114 U1_A.115 U1_A.116 U1_A.117 U1_A.118 U1_A.119 U1_A.120 U1_A.121 U1_A.122 U1_A.123 U1_A.124 U1_A.125 U1_A.126 U1_A.127 U1_A.128 U1_A.129 U1_A.130 U1_A.131 U1_A.132 U1_A.133 U1_A.134 U1_A.135 U1_A.136 | length 70322.2
  Top Layer w6: U1_A.70@5580,-1735.57 6148.51,-1735.57 6400.94,-865.24 6401.24,-864.21 6410,-834 ; U1_A.72@5580,-1680.06 6088.99,-1680.06 6399.51,-861.65 6399.88,-860.67 6410,-834 ; U1_A.74@5580,-1624.54 6034.95,-1624.54 6410,-834 ; U1_A.76@5580,-1569.03 5985.93,-1569.03 6410,-834 ; U1_A.78@5580,-1513.52 5941.51,-1513.52 6410,-834 ; U1_A.80@5580,-1458.01 5901.35,-1458.01 6410,-834 ; U1_A.82@5580,-1402.5 5865.13,-1402.5 6410,-834 ; U1_A.84@5580,-1346.98 5832.55,-1346.98 6410,-834 ; U1_A.86@5580,-1291.47 5802.37,-1291.47 6410,-834 ; U1_A.88@5580,-1235.96 5777.13,-1235.96 6410,-834 ; U1_A.90@5580,-1180.45 5753.59,-1180.45 6410,-834 ; U1_A.92@5580,-1124.94 5732.15,-1124.94 5742.65,-1120.41 6410,-834 ; U1_A.94@5580,-1069.43 5711.84,-1069.43 6410,-834 ; U1_A.96@5580,-1013.91 5690.58,-1013.91 6410,-834 ; U1_A.98@5580,-958.4 5662.44,-958.4 6410,-834 ; U1_A.100@5580,-903.9 5631.97,-903.9 6410,-834 ; U1_A.102@5580,-848.39 6410,-834 ; U1_A.104@5580,-792.87 6410,-834 ; U1_A.106@5580,-737.36 5639.81,-737.36 6410,-834 ; U1_A.108@5580,-681.85 5678.1,-681.85 6410,-834 ; U1_A.110@5580,-626.34 5701.55,-626.34 6410,-834 ; U1_A.112@5580,-570.83 5721.94,-570.83 6410,-834 ; U1_A.114@5580,-515.31 5742.65,-515.31 6410,-834 ; U1_A.116@5580,-459.8 5765.06,-459.8 6410,-834 ; U1_A.118@5580,-404.29 5789.87,-404.29 6410,-834 ; U1_A.120@5580,-348.78 5817.53,-348.78 6410,-834 ; U1_A.122@5580,-293.27 5847.23,-293.27 6410,-834 ; U1_A.124@5580,-237.76 5882.76,-237.76 6410,-834 ; U1_A.126@5580,-182.24 5920.92,-182.24 6410,-834 ; U1_A.128@5580,-126.73 5963.16,-126.73 6410,-834 ; U1_A.130@5580,-71.22 6012.68,-71.22 6410,-834 ; U1_A.132@5580,-15.71 6061.32,-15.71 6399.02,-808.23 6410,-834 ; U1_A.134@5580,39.8 6117.7,40.8 6400.15,-804.53 6410,-834 ; U1_A.136@5580,95.32 6180.49,95.32 6401.87,-801.07 ; U1_A.69@5639.06,-1763.32 6180.49,-1763.32 6401.87,-866.94 ; U1_A.71@5639.06,-1707.92 6117.7,-1708.81 6400.15,-863.47 6400.49,-862.47 6410,-834 ; U1_A.73@5639.06,-1652.3 6061.32,-1652.3 6399.02,-859.78 6399.42,-858.83 6410,-834 ; U1_A.75@5639.06,-1596.79 6012.68,-1596.79 6410,-834 ; U1_A.77@5639.06,-1541.28 5963.16,-1541.28 6410,-834 ; U1_A.79@5639.06,-1485.76 5920.92,-1485.76 6410,-834 ; U1_A.81@5639.06,-1430.25 5882.76,-1430.25 6410,-834 ; U1_A.83@5639.06,-1374.74 5847.23,-1374.74 6410,-834 ; U1_A.85@5639.06,-1319.23 5817.53,-1319.23 6410,-834 ; U1_A.87@5639.06,-1263.72 5789.87,-1263.72 6410,-834 ; U1_A.89@5639.06,-1208.2 5765.06,-1208.2 6410,-834 ; U1_A.91@5639.06,-1152.69 5742.65,-1152.69 6410,-834 ; U1_A.93@5639.06,-1097.18 5721.94,-1097.18 6410,-834 ; U1_A.95@5639.06,-1041.67 5701.55,-1041.67 6410,-834 ; U1_A.97@5639.06,-986.16 5678.1,-986.16 6410,-834 ; U1_A.99@5639.06,-930.65 5639.81,-930.65 6410,-834 ; U1_A.101@5639.05,-876.14 6410,-834 ; U1_A.103@5639.05,-820.63 6410,-834 ; U1_A.105@5639.05,-765.12 5690.58,-772.94 6410,-834 ; U1_A.107@5639.05,-709.61 5662.44,-709.61 6410,-834 ; U1_A.109@5639.05,-654.09 5690.58,-654.09 6410,-834 ; U1_A.111@5639.05,-598.58 5711.84,-598.58 6410,-834 ; U1_A.113@5639.05,-543.07 5732.15,-543.07 5742.65,-547.59 6410,-834 ; U1_A.115@5639.05,-487.56 5753.59,-487.56 6410,-834 ; U1_A.117@5639.05,-432.05 5777.13,-432.05 6410,-834 ; U1_A.119@5639.05,-376.54 5802.37,-376.54 6410,-834 ; U1_A.121@5639.05,-321.02 5832.55,-321.02 6410,-834 ; U1_A.123@5639.05,-265.51 5865.13,-265.51 6410,-834 ; U1_A.125@5639.05,-210 5901.35,-210 6410,-834 ; U1_A.127@5639.05,-154.49 5941.51,-154.49 6410,-834 ; U1_A.129@5639.05,-98.98 5985.93,-98.98 6410,-834 ; U1_A.131@5639.05,-43.46 6034.95,-43.46 6410,-834 ; U1_A.133@5639.05,12.05 6088.99,12.05 6399.51,-806.36 6410,-834 ; U1_A.135@5639.05,67.56 6148.51,67.56 6400.94,-802.77 6410,-834 ; 6401.87,-866.94 6402.13,-865.88 ; 6401.87,-866.94 6402.13,-865.89 ; 6401.87,-801.07 6410,-834 ; 6401.87,-801.07 6410,-834 ; 6402.13,-865.89 6410,-834 ; 6402.13,-865.88 6410,-834
COMB_B: R5_B.1 R6_B.1 U1_B.69 U1_B.70 U1_B.71 U1_B.72 U1_B.73 U1_B.74 U1_B.75 U1_B.76 U1_B.77 U1_B.78 U1_B.79 U1_B.80 U1_B.81 U1_B.82 U1_B.83 U1_B.84 U1_B.85 U1_B.86 U1_B.87 U1_B.88 U1_B.89 U1_B.90 U1_B.91 U1_B.92 U1_B.93 U1_B.94 U1_B.95 U1_B.96 U1_B.97 U1_B.98 U1_B.99 U1_B.100 U1_B.101 U1_B.102 U1_B.103 U1_B.104 U1_B.105 U1_B.106 U1_B.107 U1_B.108 U1_B.109 U1_B.110 U1_B.111 U1_B.112 U1_B.113 U1_B.114 U1_B.115 U1_B.116 U1_B.117 U1_B.118 U1_B.119 U1_B.120 U1_B.121 U1_B.122 U1_B.123 U1_B.124 U1_B.125 U1_B.126 U1_B.127 U1_B.128 U1_B.129 U1_B.130 U1_B.131 U1_B.132 U1_B.133 U1_B.134 U1_B.135 U1_B.136 | length 70322.2
  Bottom Layer w6: U1_B.136@5580.2,-1762 6180.69,-1762 6402.06,-865.62 ; U1_B.134@5580.2,-1706.49 6117.9,-1707.49 6400.35,-862.15 6410.2,-832.68 ; U1_B.132@5580.2,-1650.98 6061.51,-1650.98 6399.21,-858.46 6410.2,-832.68 ; U1_B.130@5580.2,-1595.46 6012.87,-1595.46 6410.2,-832.68 ; U1_B.128@5580.2,-1539.95 5963.36,-1539.95 6410.2,-832.68 ; U1_B.126@5580.2,-1484.44 5921.11,-1484.44 6410.2,-832.68 ; U1_B.124@5580.2,-1428.93 5882.96,-1428.93 6410.2,-832.68 ; U1_B.122@5580.2,-1373.42 5847.43,-1373.42 6410.2,-832.68 ; U1_B.120@5580.2,-1317.91 5817.73,-1317.91 6410.2,-832.68 ; U1_B.118@5580.2,-1262.39 5790.06,-1262.39 6410.2,-832.68 ; U1_B.116@5580.2,-1206.88 5765.25,-1206.88 6410.2,-832.68 ; U1_B.114@5580.2,-1151.37 5742.85,-1151.37 6410.2,-832.68 ; U1_B.112@5580.2,-1095.86 5722.14,-1095.86 6410.2,-832.68 ; U1_B.110@5580.2,-1040.35 5701.74,-1040.35 6410.2,-832.68 ; U1_B.108@5580.2,-984.83 5678.3,-984.83 6410.2,-832.68 ; U1_B.106@5580.2,-929.32 5640.01,-929.32 6410.2,-832.68 ; U1_B.104@5580.2,-873.81 6410.2,-832.68 ; U1_B.102@5580.2,-818.3 6410.2,-832.68 ; U1_B.100@5580.2,-762.79 5632.17,-762.79 6410.2,-832.68 ; U1_B.98@5580.2,-708.28 5662.63,-708.28 6410.2,-832.68 ; U1_B.96@5580.2,-652.77 5690.78,-652.77 6410.2,-832.68 ; U1_B.94@5580.2,-597.26 5712.04,-597.26 6410.2,-832.68 ; U1_B.92@5580.2,-541.75 5732.34,-541.75 5742.85,-546.27 6410.2,-832.68 ; U1_B.90@5580.2,-486.24 5753.79,-486.24 6410.2,-832.68 ; U1_B.88@5580.2,-430.72 5777.32,-430.72 6410.2,-832.68 ; U1_B.86@5580.2,-375.21 5802.57,-375.21 6410.2,-832.68 ; U1_B.84@5580.2,-319.7 5832.74,-319.7 6410.2,-832.68 ; U1_B.82@5580.2,-264.19 5865.32,-264.19 6410.2,-832.68 ; U1_B.80@5580.2,-208.68 5901.55,-208.68 6410.2,-832.68 ; U1_B.78@5580.2,-153.17 5941.71,-153.17 6410.2,-832.68 ; U1_B.76@5580.2,-97.65 5986.12,-97.65 6410.2,-832.68 ; U1_B.74@5580.2,-42.14 6035.15,-42.14 6410.2,-832.68 ; U1_B.72@5580.2,13.37 6089.19,13.37 6399.71,-805.03 6400.08,-806.01 6410.2,-832.68 ; U1_B.70@5580.2,68.88 6148.71,68.88 6401.14,-801.44 6401.44,-802.48 6410.2,-832.68 ; U1_B.135@5639.25,-1734.24 6148.71,-1734.24 6401.14,-863.92 6410.2,-832.68 ; U1_B.133@5639.25,-1678.73 6089.19,-1678.73 6399.71,-860.33 6410.2,-832.68 ; U1_B.131@5639.25,-1623.22 6035.15,-1623.22 6410.2,-832.68 ; U1_B.129@5639.25,-1567.71 5986.12,-1567.71 6410.2,-832.68 ; U1_B.127@5639.25,-1512.2 5941.71,-1512.2 6410.2,-832.68 ; U1_B.125@5639.25,-1456.69 5901.55,-1456.69 6410.2,-832.68 ; U1_B.123@5639.25,-1401.17 5865.32,-1401.17 6410.2,-832.68 ; U1_B.121@5639.25,-1345.66 5832.74,-1345.66 6410.2,-832.68 ; U1_B.119@5639.25,-1290.15 5802.57,-1290.15 6410.2,-832.68 ; U1_B.117@5639.25,-1234.64 5777.32,-1234.64 6410.2,-832.68 ; U1_B.115@5639.25,-1179.13 5753.79,-1179.13 6410.2,-832.68 ; U1_B.113@5639.25,-1123.61 5732.34,-1123.61 5742.85,-1119.09 6410.2,-832.68 ; U1_B.111@5639.25,-1068.1 5712.04,-1068.1 6410.2,-832.68 ; U1_B.109@5639.25,-1012.59 5690.78,-1012.59 6410.2,-832.68 ; U1_B.107@5639.25,-957.08 5662.63,-957.08 6410.2,-832.68 ; U1_B.105@5639.25,-901.57 5690.78,-893.75 6410.2,-832.68 ; U1_B.103@5639.25,-846.06 6410.2,-832.68 ; U1_B.101@5639.25,-790.54 6410.2,-832.68 ; U1_B.99@5639.25,-736.04 5640.01,-736.04 6410.2,-832.68 ; U1_B.97@5639.25,-680.53 5678.3,-680.53 6410.2,-832.68 ; U1_B.95@5639.25,-625.02 5701.74,-625.02 6410.2,-832.68 ; U1_B.93@5639.25,-569.5 5722.14,-569.5 6410.2,-832.68 ; U1_B.91@5639.25,-513.99 5742.85,-513.99 6410.2,-832.68 ; U1_B.89@5639.25,-458.48 5765.25,-458.48 6410.2,-832.68 ; U1_B.87@5639.25,-402.97 5790.06,-402.97 6410.2,-832.68 ; U1_B.85@5639.25,-347.46 5817.73,-347.46 6410.2,-832.68 ; U1_B.83@5639.25,-291.94 5847.43,-291.94 6410.2,-832.68 ; U1_B.81@5639.25,-236.43 5882.96,-236.43 6410.2,-832.68 ; U1_B.79@5639.25,-180.92 5921.11,-180.92 6410.2,-832.68 ; U1_B.77@5639.25,-125.41 5963.36,-125.41 6410.2,-832.68 ; U1_B.75@5639.25,-69.9 6012.87,-69.9 6410.2,-832.68 ; U1_B.73@5639.25,-14.39 6061.51,-14.39 6399.21,-806.9 6399.62,-807.85 6410.2,-832.68 ; U1_B.71@5639.25,41.24 6117.9,42.13 6400.35,-803.21 6400.69,-804.22 6410.2,-832.68 ; U1_B.69@5639.25,96.64 6180.69,96.64 6402.06,-799.75 ; 6402.06,-865.62 6410.2,-832.68 ; 6402.06,-865.62 6410.2,-832.68 ; 6402.06,-799.75 6402.32,-800.8 ; 6402.06,-799.75 6402.32,-800.8 ; 6402.32,-800.8 6410.2,-832.68 ; 6402.32,-800.8 6410.2,-832.68
COMBMD_A: J1.8 R5_A.2 | length 726.3
  Top Layer w20: 6508.38,-312.01 6627.73,-312.01 6678.89,-363.17 J1.8@6807.24,-363.17
  Top Layer w40: R5_A.2@6435.05,-687.87 6435.05,-385.34 6508.38,-312.01
COMBZIFF_A: J3_A.1 R6_A.2 | length 575.4
  Top Layer w20: 6497.24,-1240.05 6497.24,-1323.43 6512.85,-1339.04 6630.35,-1339.04 6638.27,-1346.96 J3_A.1@6692.77,-1346.96
  Top Layer w40: R6_A.2@6435.05,-979.02 6435.05,-1177.86 6497.24,-1240.05
COMBZIFF_B: J3_B.1 R6_B.2 | length 722.3
  Bottom Layer w20: 6497.8,-1233 6497.8,-1460.84 6541.66,-1504.7 J3_B.1@6692.77,-1504.7
  Bottom Layer w40: R6_B.2@6435,-978.35 R6_B.2@6435.69,-979.04 ; R6_B.2@6435.69,-978.35 R6_B.2@6435.69,-979.04 ; 6497.8,-1233 6435.69,-1170.9 R6_B.2@6435.69,-979.04
FREQA0: J2A.46 U1_A.45 | length 1281.9
  Top Layer w6: J2A.46@908.43,-1181.1 1071.77,-1181.1 1142.75,-1110.12 1975.48,-1110.12 1990.3,-1124.94 U1_A.45@2154.8,-1124.94
FREQA1: J2A.36 U1_A.40 | length 1337.3
  Top Layer w6: J2A.36@908.43,-1062.99 1023.68,-1062.99 1079,-1007.67 2013.57,-1007.67 2035.07,-986.17 U1_A.40@2213.86,-986.17
FREQA2: J1A.24 U1_A.13 | length 1996.4
  Top Layer w6: J1A.24@222.44,-271.65 933.62,-271.65 993.46,-331.5 1881.27,-331.5 1976.02,-236.76 U1_A.13@2154.8,-236.76
FREQA3: J1A.52 U1_A.27 | length 1941.9
  Top Layer w6: J1A.52@222.44,-602.36 808.16,-602.36 824.16,-618.36 1315.78,-618.36 1322.76,-625.34 U1_A.27@2154.8,-625.34
FREQA4: J1A.64 J2A.9 J2A.10 U1_A.33 | length 1952.2
  Top Layer w6: J1A.64@222.44,-744.09 J2A.9@685.98,-744.09 741.85,-744.09 753.66,-755.91 1167.23,-755.91 1203.2,-791.87 U1_A.33@2154.8,-791.87
FREQA5: J2A.72 U1_A.58 | length 1397
  Top Layer w6: J2A.72@908.43,-1488.19 1188.16,-1488.19 1299.86,-1376.49 1785.94,-1376.49 1895.22,-1485.77 U1_A.58@2213.86,-1485.77
FREQA6: J1A.30 U1_A.16 | length 2042.5
  Top Layer w6: J1A.30@222.44,-342.52 910.09,-342.52 960.54,-392.97 1933.02,-392.97 2005.97,-320.02 U1_A.16@2213.86,-320.02
FREQA7: J2A.84 U1_A.64 | length 1422.8
  Top Layer w6: J2A.84@908.43,-1629.92 1241.26,-1629.92 1371.75,-1499.43 1712.98,-1499.43 1865.85,-1652.31 U1_A.64@2213.86,-1652.31
FREQA8: J1A.4 U1_A.3 | length 2039.5
  Top Layer w6: J1A.4@222.44,-35.43 1038.89,-35.43 1130.05,-126.6 1685.59,-126.6 1852.99,40.8 U1_A.3@2154.8,40.8
FREQA9: J1A.16 U1_A.9 | length 2013.6
  Top Layer w6: J1A.16@222.44,-177.17 966.83,-177.17 1039.2,-249.54 1788.95,-249.54 1912.76,-125.73 U1_A.9@2154.8,-125.73
FREQA10: J2A.78 U1_A.61 | length 1350.8
  Top Layer w6: J2A.78@908.43,-1559.06 1213.57,-1559.05 1334.66,-1437.96 1753.12,-1437.96 1884.2,-1569.04 U1_A.61@2154.8,-1569.04
FREQA11: J2A.30 U1_A.37 | length 1283.3
  Top Layer w6: J2A.30@908.43,-992.13 992.5,-992.13 1038.42,-946.2 1950.54,-946.2 1993.84,-902.9 U1_A.37@2154.8,-902.9
FREQA12: J1A.12 U1_A.7 | length 2022.2
  Top Layer w6: J1A.12@222.44,-129.92 988.24,-129.92 1066.88,-208.56 1280,-208.56 1509.73,-208.56 1764.17,-208.56 1902.5,-70.22 U1_A.7@2154.8,-70.22
FREQA13: J1A.36 U1_A.19 | length 1970.6
  Top Layer w6: J1A.36@222.44,-413.39 887.12,-413.39 928.17,-454.44 1997.25,-454.44 2048.4,-403.29 U1_A.19@2154.8,-403.29
FREQA14: J2A.42 U1_A.43 | length 1273.3
  Top Layer w6: J2A.42@908.43,-1133.86 1052.74,-1133.86 1117.46,-1069.14 2059.71,-1069.14 2060,-1069.43 U1_A.43@2154.8,-1069.43
FREQA15: J2A.54 U1_A.49 | length 1299.1
  Top Layer w6: J2A.54@908.43,-1275.59 1095.9,-1275.59 1179.41,-1192.08 1918.47,-1192.08 1962.36,-1235.97 U1_A.49@2154.8,-1235.97
FREQA16: J1A.40 U1_A.21 | length 1961.9
  Top Layer w6: J1A.40@222.44,-460.63 867.14,-460.63 901.93,-495.42 2032.5,-495.42 2069.11,-458.8 U1_A.21@2154.8,-458.8
FREQA17: J2A.66 U1_A.55 | length 1325
  Top Layer w6: J2A.66@908.43,-1417.32 1152.03,-1417.32 1254.33,-1315.02 1831.32,-1315.02 1918.8,-1402.5 U1_A.55@2154.8,-1402.5
FREQA18: J1A.48 U1_A.25 | length 1944.7
  Top Layer w6: J1A.48@222.44,-555.12 831.69,-555.12 853.95,-577.38 2109.68,-577.38 2117.23,-569.83 U1_A.25@2154.8,-569.83
FREQA19: J1A.60 J2A.5 J2A.6 U1_A.31 | length 1948.7
  Top Layer w6: J1A.60@222.44,-696.85 J2A.5@685.98,-696.85 760.73,-696.85 772.54,-708.66 J2A.6@908.43,-708.66 1212.95,-708.66 1240.65,-736.36 U1_A.31@2154.8,-736.36
FREQA20: J2A.90 U1_A.67 | length 1376.7
  Top Layer w6: J2A.90@908.43,-1700.79 1273.29,-1700.79 1413.17,-1560.9 1659.22,-1560.9 1833.89,-1735.57 U1_A.67@2154.8,-1735.57
FREQA21: J2A.58 U1_A.51 | length 1307.8
  Top Layer w6: J2A.58@908.43,-1322.83 1114.52,-1322.83 1204.29,-1233.06 1885.15,-1233.06 1943.57,-1291.48 U1_A.51@2154.8,-1291.48
FREQA22: J1A.6 U1_A.4 | length 2094.2
  Top Layer w6: J1A.6@222.44,-59.06 1027.71,-59.06 1115.74,-147.09 1703.87,-147.09 1864,13.05 U1_A.4@2213.86,13.05
FREQA23: J1A.54 U1_A.28 | length 2002.6
  Top Layer w6: J1A.54@222.44,-625.98 790.66,-625.98 803.52,-638.85 1285.11,-638.85 1299.36,-653.09 U1_A.28@2213.86,-653.09
FREQA24: J1A.18 U1_A.10 | length 2068.4
  Top Layer w6: J1A.18@222.44,-200.79 958.31,-200.79 1027.55,-270.03 1812.03,-270.03 1928.57,-153.49 U1_A.10@2213.86,-153.49
FREQA25: J1A.28 U1_A.15 | length 1987.8
  Top Layer w6: J1A.28@222.44,-318.9 915.47,-318.9 969.05,-372.48 1913.77,-372.48 1993.98,-292.27 U1_A.15@2154.8,-292.27
FREQA26: J2A.34 U1_A.39 | length 1279.9
  Top Layer w6: J2A.34@908.43,-1039.37 1014.02,-1039.37 1066.21,-987.18 1991.38,-987.18 2020.16,-958.41 U1_A.39@2154.8,-958.41
FREQA27: J2A.82 U1_A.63 | length 1359.4
  Top Layer w6: J2A.82@908.43,-1606.3 1228.37,-1606.3 1355.72,-1478.94 1733.35,-1478.94 1878.95,-1624.55 U1_A.63@2154.8,-1624.55
FREQA28: J1A.66 J2A.11 J2A.12 U1_A.34 | length 2012.9
  Top Layer w6: J1A.66@222.44,-767.72 J2A.11@685.98,-767.72 724.84,-767.72 736.65,-779.53 1143.07,-779.53 1183.17,-819.63 U1_A.34@2213.86,-819.63
FREQA29: J2A.48 U1_A.46 | length 1345.3
  Top Layer w6: J2A.48@908.43,-1204.72 1078.15,-1204.72 1152.26,-1130.61 1962.05,-1130.61 1984.14,-1152.7 U1_A.46@2213.86,-1152.7
FREQA30: J2A.70 U1_A.57 | length 1333.6
  Top Layer w6: J2A.70@908.43,-1464.57 1175.78,-1464.57 1284.35,-1356 1795.83,-1356 1897.84,-1458.02 U1_A.57@2154.8,-1458.02
FREQA31: J1A.42 U1_A.22 | length 2016.7
  Top Layer w6: J1A.42@222.44,-484.25 861.41,-484.25 893.07,-515.91 2051.67,-515.91 2081.02,-486.56 U1_A.22@2213.86,-486.56
FREQA32: J2A.60 U1_A.52 | length 1371.1
  Top Layer w6: J2A.60@908.43,-1346.46 1122.31,-1346.46 1215.21,-1253.55 1873.8,-1253.55 1939.49,-1319.24 U1_A.52@2213.86,-1319.24
FREQA33: R1_A.2 U1_A.1 | length 1515.1
  Top Layer w6: R1_A.2@777,64 1118.5,64 1268.11,-85.62 1655.38,-85.62 1837.31,96.32 U1_A.1@2154.8,96.32
FREQA34: R2_A.2 U1_A.68 | length 2148
  Top Layer w6: R2_A.2@236.94,-1651.23 374.8,-1651.23 455.44,-1731.87 1276.54,-1731.87 1427.02,-1581.39 1618.95,-1581.39 1800.88,-1763.33 U1_A.68@2213.86,-1763.33